# Altium PCB ST-Link.PcbDoc
Units mil, origin at the board's own origin, x right, y up, seen from the top; angles counter-clockwise.
Board outline 1000 x 435 mil, 2 copper layers (Top1, Bottom2), stack 12.8 mil thick; 29 components, 35 nets, 136 pads, 50 vias.
Unrouted connection lines stored in the file: 22.
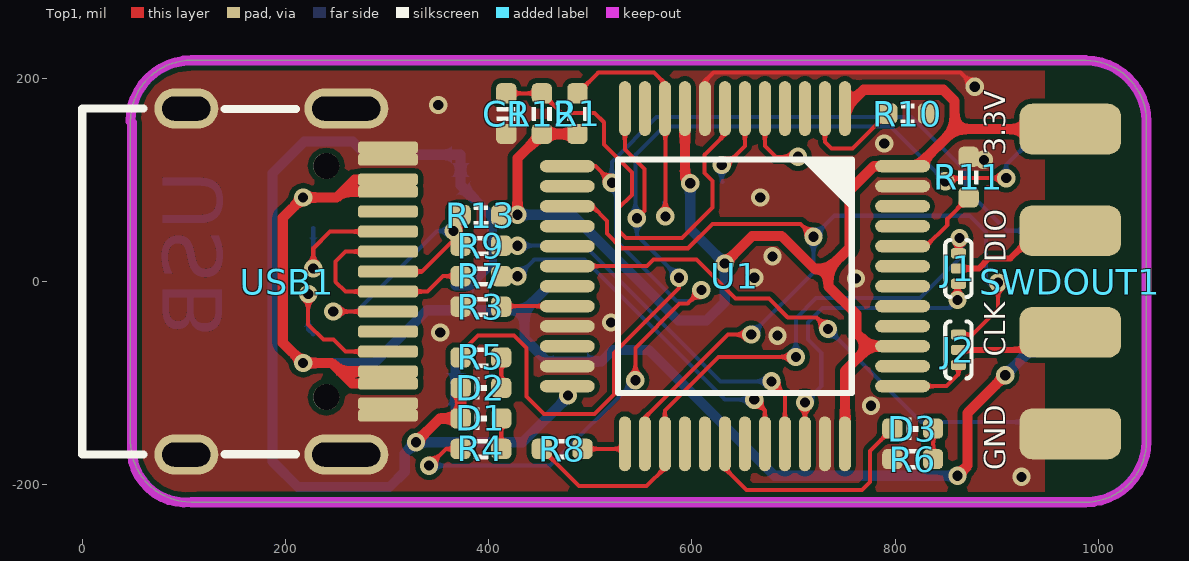
[diagram p0: Top1 view]
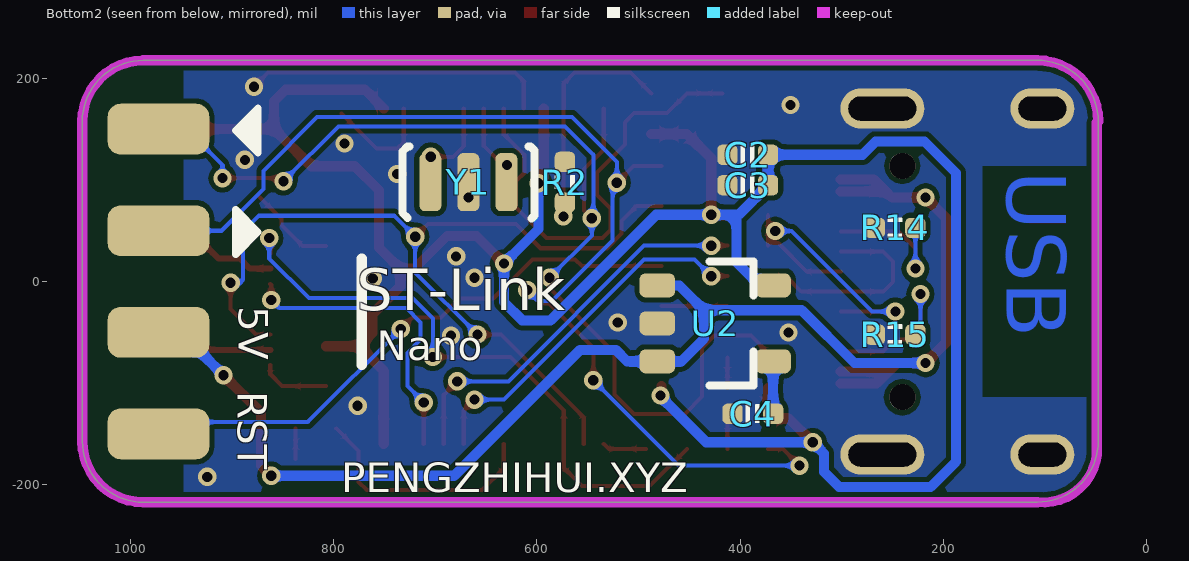
[diagram p1: Bottom2 view, seen from below]
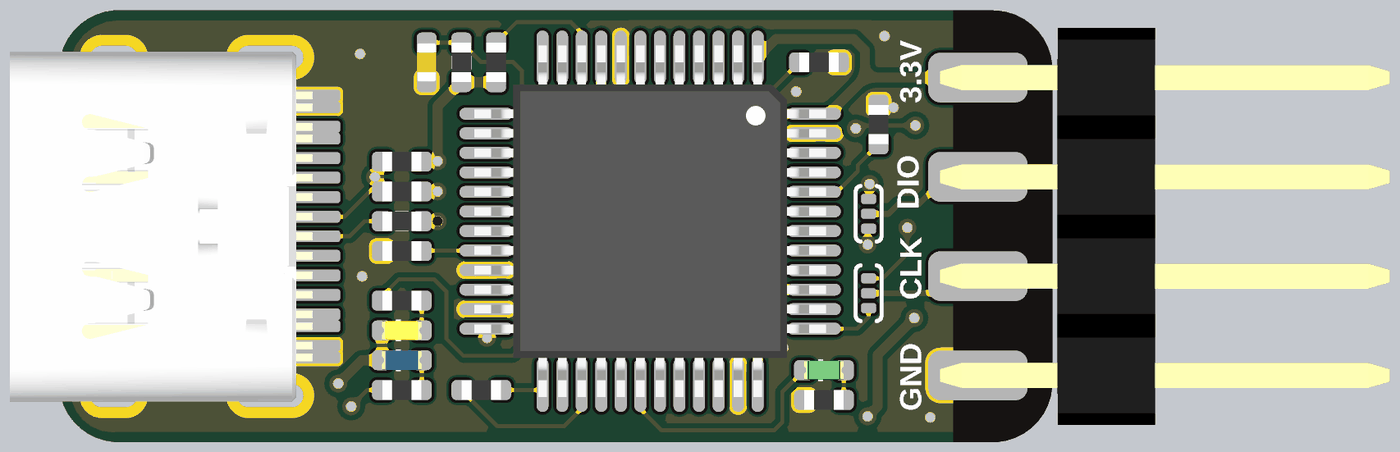
[diagram p2: 3D render of the assembled board from above, using the file's embedded part models]
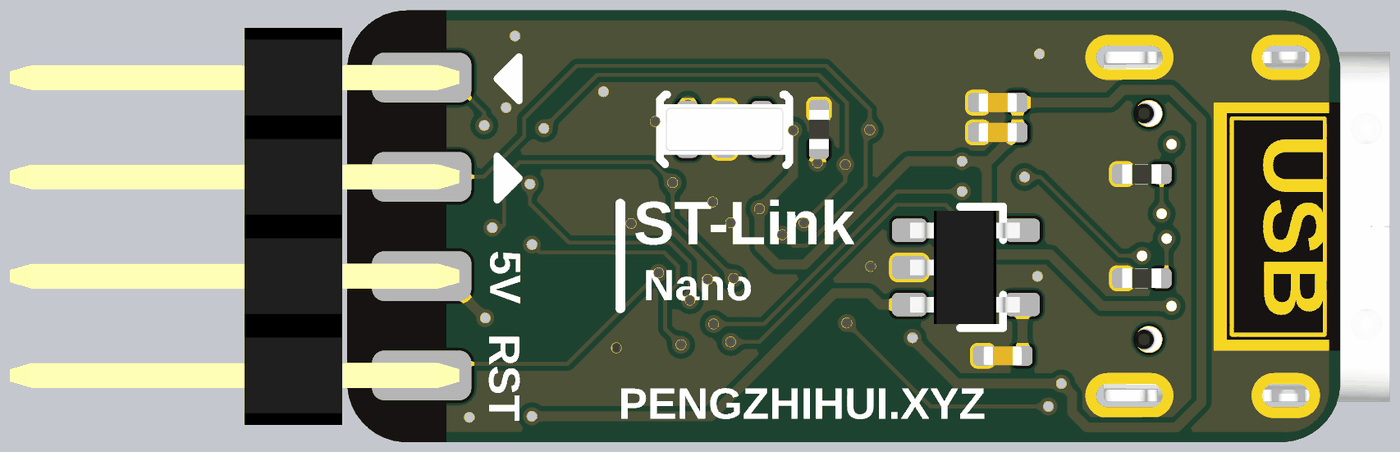
[diagram p3: 3D render of the assembled board from below, using the file's embedded part models]

## Layer stack, top to bottom
Top Solder: solder mask 0.4, Solder Resist, Dk 3.5
Top1: signal copper 1.4
Dielectric 1: core 10, FR-4, Dk 4.2
Bottom2: signal copper 1.4
Bottom Solder: solder mask 0.4, Solder Resist, Dk 3.5

## Board outline
47.36,-157.15 ccw(c107.36,-157.15) 107.36,-217.15 107.36,-217.22 987.31,-217.22 ccw(c987.31,-157.22) 1047.31,-157.22 1047.36,-157.22 1047.36,157.59 ccw(c987.36,157.59) 987.36,217.59 987.36,217.78 107.39,217.78 ccw(c107.39,157.78) 47.39,157.78 47.36,157.78

## Design rules (kind name [scope] priority, off if disabled: settings)
Clearance [All] p1: gap=5 ignorepadtopadclearanceinfootprint=FALSE
ComponentClearance [All] p1: gap=0 collisioncheckmode=3 verticalgap=0 showdistances=FALSE
DiffPairsRouting [All] p1: maxlimit=9 minlimit=9 mostfreqgap=9 toplayer_minwidth=4 toplayer_maxwidth=4 toplayer_prefwidth=4 bottomlayer_minwidth=4 bottomlayer_maxwidth=4 bottomlayer_prefwidth=4 maxuncoupledlength=500
FanoutControl Fanout_BGA [All] p1: bgadir=Out bgaviamode=Centered fanoutstyle=Auto fanoutdirection=Alternating viagrid=1 // Fanout_BGA (Default Rule)
HoleSize [All] p1: absolutevalues=TRUE maxlimit=10000 minlimit=8 maxpercent=80.000 minpercent=20.000
MinimumSolderMaskSliver [All] p1 off: minsoldermaskwidth=2
PlaneClearance [All] p1: clearance=8
PlaneConnect [All] p1: planeconnectstyle=Direct reliefexpansion=20 reliefentries=4 reliefconductorwidth=10 reliefairgap=10
PolygonConnect [All] p1: connectstyle=Direct reliefconductorwidth=10 reliefentries=4 polygonreliefangle="90 Angle" airgapwidth=10
RoutingVias [All] p1: holewidth=8 width=16 viastyle="Through Hole" minholewidth=6 minwidth=12 maxholewidth=28 maxwidth=50
SilkToBoardRegionClearance [All] p1 off:
SilkToSilkClearance [All] p1: silktosilkclearance=0
SilkToSolderMaskClearance [IsPad] p1: minsilkscreentomaskgap=0 clearancetoexposedcopper=TRUE
SolderMaskExpansion [All] p1: expansion=3 istentingtop=FALSE
Width [All] p1: maxlimit=10000 minlimit=4 preferedwidth=4
20 further rules are at their usual default settings.

## Classes and differential pairs
differential pair USB: +USB_P -USB_N

## Components (designator, comment, footprint, x,y, rotation, side; value= is the part's Value field where it differs from the comment)
C1 "0.1uF" CAP_0402 417.36,165.28 r90 top value=0.1u
C2 "0.1uF" CAP_0402 392.36,124.78 r180 bottom value=0.1u
C3 "10uF" CAP_0402 392.36,94.78 r180 bottom value=0.1u
C4 "10nF" CAP_0402 387.36,-130.22 r180 bottom value=0.1u
D1 "color?" LED_0402_BLUE 392.36,-134.72 r0 top
D2 "color?" LED_0402_YELLOW 392.36,-104.72 r0 top
D3 "color?" LED_0402_GREEN 817.36,-144.72 r0 top
J1 "选择跳线" jumper-3 862.36,12.78 r270 top
J2 "选择跳线" jumper-3 862.36,-67.22 r270 top
R1 "10K" RES_0402 487.36,165.28 r90 top value=22R
R2 "10K" RES_0402 572.36,97.78 r90 bottom value=22R
R3 "10K" RES_0402 392.36,-24.72 r180 top value=22R
R4 "680R" RES_0402 392.36,-164.72 r0 top value=22R
R5 "680R" RES_0402 392.36,-74.72 r0 top value=22R
R6 "2K" RES_0402 817.36,-174.72 r0 top value=22R
R7 "22R" RES_0402 392.36,5.28 r0 top
R8 "100R" RES_0402 472.36,-164.72 r180 top value=22R
R9 "22R" RES_0402 392.36,35.28 r0 top
R10 "10K" RES_0402 812.36,165.28 r180 top value=22R
R11 "10K" RES_0402 872.36,102.78 r90 top value=22R
R12 "10K" RES_0402 452.36,165.28 r270 top value=22R
R13 "1K5" RES_0402 392.36,65.28 r0 top value=22R
R14 "5.1K" RES_0402 247.36,52.78 r0 bottom value=22R
R15 "5.1K" RES_0402 247.36,-52.22 r0 bottom value=22R
SWDOUT1 "HDR2x4_2.54" HDR2X4_2.54_180H 972.36,150 r0 top
U1 "STM32F103CBT6" LQFP-48 642.36,5.28 r270 top locked
U2 "SPX3819M5" SOT23-5 422.36,-41.22 r180 bottom
USB1 "Type-C" Type-C-TOP 201.57,0 r180 top
Y1 "8MHz" 晶振-3P 667.36,97.78 r0 bottom

## Footprints (in the part's own frame and the unit in brackets; to place one, negate y for a bottom-side part, rotate by r counter-clockwise, add the part's x,y. Pads: shape width x height; smd on the part's side, far side on the other; paste and mask are expansions set on the pad)
CAP_0402 [mil]
  rrect50% 20x20 smd: 1(-20,0) 2(20,0)
  silkscreen extent -7,-9 7,9, body extent -20,-10 20,10, height 20
HDR2X4_2.54_180H [mil]
  rrect50% 100x50 smd: 1(0,0) 3(0,-100) 5(0,-200) 7(0,-300)
  rrect50% 100x50 smd far side: 2(0,0) 4(0,-100) 6(0,-200) 8(0,-300)
  body extent -38,-350 415,50, height 100
jumper-3 [mil] "选择焊盘"
  rrect50% 10x15 smd: 1(-15,0) 2(0,0) 3(15,0)
  silkscreen extent -28,-13 28,13
LED_0402_BLUE [mil]
  rrect50% 20x20 smd: 1(-20,0) 2(20,0)
  silkscreen extent -6,-10 6,10, body extent -20,-10 20,10, height 18
LED_0402_GREEN [mil]
  rrect50% 20x20 smd: 1(-20,0) 2(20,0)
  silkscreen extent -6,-10 6,10, body extent -20,-10 20,10, height 18
LED_0402_YELLOW [mil]
  rrect50% 20x20 smd: 1(-20,0) 2(20,0)
  silkscreen extent -6,-10 6,10, body extent -20,-10 20,10, height 18
LQFP-48 [mil]
  oval 54x12 smd: 1(-165,108.27) 2(-165,88.58) 3(-165,68.9) 4(-165,49.21) 5(-165,29.53) 6(-165,9.84) 7(-165,-9.84) 8(-165,-29.53) 9(-165,-49.21) 10(-165,-68.9) 11(-165,-88.58) 12(-165,-108.27) 25(165,-108.27) 26(165,-88.58) 27(165,-68.9) 28(165,-49.21) 29(165,-29.53) 30(165,-9.84) 31(165,9.84) 32(165,29.53) 33(165,49.21) 34(165,68.9) 35(165,88.58) 36(165,108.27)
  oval 12x54 smd: 13(-108.27,-165) 14(-88.58,-165) 15(-68.9,-165) 16(-49.21,-165) 17(-29.53,-165) 18(-9.84,-165) 19(9.84,-165) 20(29.53,-165) 21(49.21,-165) 22(68.9,-165) 23(88.58,-165) 24(108.27,-165) 37(108.27,165) 38(88.58,165) 39(68.9,165) 40(49.21,165) 41(29.53,165) 42(9.84,165) 43(-9.84,165) 44(-29.53,165) 45(-49.21,165) 46(-68.9,165) 47(-88.58,165) 48(-108.27,165)
  silkscreen extent -115,-115 115,115, body extent -177,-177 177,177, height 61
RES_0402 [mil]
  rrect50% 20x20 smd: 1(-20,0) 2(20,0)
  silkscreen extent -7,-10 7,10, body extent -20,-10 20,10, height 14
SOT23-5 [mm] "SOT23, 3-Leads, Body 3.1x3.0mm (max), Pitch 0.95mm, IPC Medium Density"
  rrect50% 0.889x0.6 smd: 1(-1.5,0.95) 2(-1.5,0) 3(-1.5,-0.95) 4(1.396,-0.95) 5(1.396,0.95)
  silkscreen extent -0.2,-1.55 0.9,1.55, body extent -1.48,-1.45 1.32,1.45, height 1.2
Type-C-TOP [mm]
  round 0.65 hole 0.65: 0(-0.98,2.89) 0(-0.98,-2.89)
  oval 1.6x1 hole 0.6 slot 1.2 at 0 deg: 1(2.52,4.325) 2(2.52,-4.325)
  oval 2.1x1 hole 0.6 slot 1.7 at 0 deg: 3(-1.48,-4.325) 4(-1.48,4.325)
  rrect50% 1.5x0.3 smd: A1(-2.52,-3.35) A4(-2.52,-2.55) A5(-2.52,-1.25) A6(-2.52,-0.25) A7(-2.52,0.25) A8(-2.52,1.25) A9(-2.52,2.55) A12(-2.52,3.35) B1(-2.52,3.05) B4(-2.52,2.25) B5(-2.52,1.75) B6(-2.52,0.75) B7(-2.52,-0.75) B8(-2.52,-1.75) B9(-2.52,-2.25) B12(-2.52,-3.05)
  silkscreen extent -0.22,-4.33 5.12,4.33, body extent -2.57,-4.48 5.18,4.48, height 3.26
晶振-3P [mm] "贴片晶振"
  rrect50% 0.55x1.45 smd: 1(-0.95,0) 2(0,0) 3(0.95,0)
  silkscreen extent -1.65,-0.89 1.65,0.91, body extent -1.6,-0.89 1.65,0.89, height 0.7

## Part data
C1 C2 C3 C4: library part 电容-0402, "Capacitor"
D1 D2 D3: library part LED_0402, "LED", Type=0402
J1 J2: "Resistor", LatestRevisionDate=17-Jul-2002, LatestRevisionNote="Re-released for DXP Platform.", PackageDescription="Axial Device, Thru-Hole; 2 Leads; 0.4 in Pin Spacing", PackageReference=AXIAL-0.4, Published=8-Jun-2000, Publisher="Altium Limited"
R1 R2 R3 R4 R5 R6 R7 R8 R9 R10 R11 R12 R13 R14 R15: library part 电阻-0402, "Resistor"
SWDOUT1: "Header"
U1: "ARM Cortex-M3 32-bit MCU, 128 KB Flash, 20 KB Internal RAM, 37 I/Os, 48-pin LQFP, -40 to 85 degC, Tray", I/Os (High Current)=37, Operating Frequency(F) (Processor speed) (MHz)=72, Supplier Part Number 1=497-6288-ND, Supply Voltage(Vcc) min (V)=2, A/D Converter="2x12-bit (10 Channel)", ComponentLink1Description="Manufacturer URL", ComponentLink1URL=http://www.st.com/web/en/home.html, ComponentLink2Description=Datasheet, ComponentLink2URL=http://www.st.com/st-web-ui/static/active/en/resource/technical/document/datasheet/CD00161566.pdf, ComponentLink3Description="Package Specification", ComponentLink3URL=http://www.st.com/st-web-ui/static/active/en/resource/technical/document/datasheet/DM00058181.pdf, Core="ARM Cortex-M3", DatasheetVersion="Rev. 16", FLASH Size (Prog) (kB)=128, Internal RAM Size (kB)=20, Mounting Technology="Surface Mount", PackageDescription="48-Pin Low Profile Quad Flat Package, 7 x 7 mm Body, 0.5 mm Pitch", PackageReference=LQFP48, PackageVersion="Rev. 6, 06/2013", Packing=Tray, PartNumber=STM32F103CBT6, Supplier 1=Digi-Key, Supplier 2=Farnell, Supplier 3=Newark, Supplier 4=Newark, Supplier 5=Mouser, Supplier Part Number 2=1606327, Supplier Part Number 3=11N8296, Supplier Part Number 4=57P1214, Supplier Part Number 5=511-STM32F103CBT6
U2: "LDO"
USB1: library part USB-Type-C-TOP
Y1: library part 晶振-3Pin, "村田贴片"

## Via types
v1: diameter 18, hole 10, Top1 to Bottom2, tented both sides, 50 vias

## Nets (pads, with @x,y where several pads share a name; then routed paths per layer and width w, separated by ;. In a path a pad name is that pad's centre, name@x,y a point inside that pad or via, vN(x,y) a via of type N, cw(c..) or ccw(c..) an arc to the next point about the centre after c; other vN are vias at no path point)
3V3: C2.2 C3.2 D1.1 D2.1 R1.1 R12.2 R13.2 SWDOUT1.1 U1.1 U1.9 U1.24 U1.36 U1.39 U1.48 U2.5 | length 2561.3
  Top1 w10: v1(328.36,-158.22) 351.86,-134.72 D1.1 D2.1 ; R13.2 427.86,65.28 v1(428.36,65.78) 428.36,121.28 R12.2 R1.1 ; U1.24 477.36,-111.34 v1(478.15,-112.14) ; U1.9 593.15,101.99 v1(598.36,96.78) ; v1(632.36,17.78) 659.36,44.78 688.36,44.78 720.85,12.29 734.36,12.29 ; U1.36 750.63,-87.96 774.96,-63.62 ; U1.1 769.13,188.78 847.36,188.78 858.59,177.55 858.59,150 ; U1.39 774.96,-63.62 ; SWDOUT1.1@977.36,150 858.59,150 ; 734.36,12.29 734.36,-4.59 762,-32.22 762,-50.66 774.96,-63.62 ; 734.36,12.29 755.36,33.29 755.36,89.78 779.13,113.54 U1.48 822.13,113.54 858.59,150
  Bottom2 w10: U2.5 380.76,-3.82 403.36,18.78 403.36,65.78 ; v1(478.15,-112.14) 478.15,-113.43 433.36,-158.22 v1(328.36,-158.22) 317.36,-169.22 317.36,-187.22 302.36,-202.22 212.36,-202.22 187.36,-177.22 187.36,106.78 218.36,137.78 266.36,137.78 279.36,124.78 C2.2 C3.2 401.36,65.78 403.36,65.78 ; v1(598.36,96.78) 598.36,51.78 v1(632.36,17.78) 632.36,-20.22 614.36,-38.22 586.36,-38.22 482.36,65.78 v1(428.36,65.78) 403.36,65.78
5V: SWDOUT1.6 U2.1 U2.3 USB1.A4 USB1.A9 USB1.B4 USB1.B9 | length 1473.8
  Top1 w10: USB1.A9 265.53,-100.39 253.72,-88.58 ; USB1.B4 253.72,-88.58 ; USB1.B9 256.17,88.58 ; USB1.A4 267.98,100.39 256.17,88.58 ; v1(861.36,-191.22) 871.36,-181.22 871.36,-129.22 v1(908.36,-92.22) ; 253.72,-88.58 245.36,-80.22 v1(217.36,-80.22) 197.36,-60.22 197.36,62.78 v1(217.36,82.78) 250.36,82.78 256.17,88.58
  Bottom2 w10: v1(217.36,-80.22) 287.36,-80.22 339.36,-28.22 435.36,-28.22 ; U2.1 459.76,-3.82 435.36,-28.22 ; v1(861.36,-191.22) 681.36,-191.22 557.36,-67.22 522.36,-67.22 510.96,-78.63 U2.3 457.76,-78.63 435.36,-56.22 435.36,-28.22 ; v1(908.36,-92.22) 950.59,-50 SWDOUT1.6@977.36,-50
GND: C1.1 C2.1 C3.1 C4.1 R2.2 R3.2 R6.1 R10.1 R11.2 R14.2 R15.2 SWDOUT1.7 U1.8 U1.21 U1.23 U1.35 U1.47 U2.2 USB1.1 USB1.2 USB1.3 USB1.4 USB1.A1 USB1.A12 USB1.B1 USB1.B12 Y1.2 | length 301.8
  Top1 w4: U1.8 612.83,197.25 621.36,205.78 864.36,205.78 v1(878.36,191.78)
  other v1: 924.36,-192.22 776.36,-122.22 684.36,-53.22 352.36,-50.22 520.36,-40.22 661.36,3.78 761.5,3.07 679.36,24.78 667.36,82.78 737.36,105.78 887.36,119.78 789.36,135.78 350.36,173.78
JTCK: J2.1 U1.15 U1.26 | length 888.5
  Top1 w4: U1.15 502.07,74.17 516.66,59.59 516.66,47.07 530.96,32.78 596.36,32.78 620.36,56.78 707.04,56.78 v1(719.68,44.13) ; U1.26 553.78,-133.81 635.36,-52.22 v1(658.36,-52.22) ; J2.1 876.36,-52.22 901.36,-27.22 v1(901.36,-1.22)
  Bottom2 w4: v1(658.36,-52.22) 719.68,9.09 v1(719.68,44.13) 740.32,64.78 873.36,64.78 889.36,48.78 889.36,1.78 892.36,-1.22 v1(901.36,-1.22)
JTDI: U1.17
JTDO: U1.16
JTMS: J1.1 R8.2 U1.27 | length 609.6
  Top1 w4: R8.2 488.86,-201.22 555.54,-201.22 573.46,-183.3 U1.27 573.46,-126.85 626.09,-74.22 v1(702.36,-74.22) ; J1.1 862.36,41.78 v1(863.36,42.78)
  Bottom2 w4: v1(702.36,-74.22) 702.36,-36.22 722.36,-16.22 824.36,-16.22 863.36,22.78 v1(863.36,42.78)
LED_RUN: D3.1 U1.30 | length 240.8
  Top1 w4: U1.30 632.52,-183.89 653.86,-205.22 767.36,-205.22 775.36,-197.22 775.36,-166.72 D3.1
NetC1_2: C1.2 R12.1 U1.7 | length 448.7
  Top1 w4: C1.2 R12.1 471.86,165.78 504.36,165.78 513.36,156.78 513.36,134.68 540.86,107.18 540.86,85.28 527.36,71.78 527.36,50.78 535.36,42.78 590.36,42.78 620.36,72.78 620.36,98.78 612.36,106.78 612.36,124.78 632.52,144.93 U1.7
NetC4_2: C4.2 U2.4 | length 51.6
  Bottom2 w10: C4.2 U2.4
NetD1_2: D1.2 R4.2 | length 30
  Top1 w4: R4.2 D1.2
NetD2_2: D2.2 R5.2 | length 30
  Top1 w4: D2.2 R5.2
NetD3_2: D3.2 R6.2 | length 30
  Top1 w4: R6.2 D3.2
NetJ1_2: J1.2 SWDOUT1.3 | length 125.4
  Top1 w6: J1.2 882.36,12.78 892.36,22.78 913.36,22.78 940.59,50 SWDOUT1.3
NetJ2_2: J2.2 SWDOUT1.5 | length 122.1
  Top1 w6: J2.2 960.14,-67.22 SWDOUT1.5@977.36,-50
NetR1_2: R1.2 R2.1 U1.10 | length 244.3
  Top1 w4: R1.2 507.86,205.78 562.73,205.78 573.46,195.04 U1.10 573.87,169.87 v1(573.87,64.16)
  Bottom2 w4: R2.1 573.46,76.67 573.46,64.56 v1(573.87,64.16)
NetR3_1: R3.1 U1.20 | length 64.5
  Top1 w4: R3.1@412.83,-24.25 U1.20
NetR7_2: R7.2 U1.32 | length 360.9
  Top1 w4: R7.2 v1(428.36,5.28) ; v1(661.36,-116.22) 671.89,-126.75 U1.32
  Bottom2 w4: v1(428.36,5.28) 444.86,21.78 494.36,21.78 632.36,-116.22 v1(661.36,-116.22)
NetR8_1: R8.1 U1.25 | length 43.8
  Top1 w4: R8.1 529.09,-164.72 U1.25
NetR9_2: R9.2 U1.33 | length 388.3
  Top1 w4: R9.2 v1(428.36,35.28) ; v1(678.36,-98.22) 691.57,-111.44 U1.33
  Bottom2 w4: v1(428.36,35.28) 494.53,35.28 628.03,-98.22 v1(678.36,-98.22)
NetR10_2: R10.2 U1.2 | length 111.4
  Top1 w4: U1.2 730.94,137.24 737.39,130.8 757.89,130.8 R10.2
NetR11_1: R11.1 U1.44 | length 88.4
  Top1 w4: U1.44 830.43,34.8 851.36,55.74 851.36,61.78 R11.1
NetR14_1: R14.1 USB1.A5 | length 140.2
  Top1 w4: v1(227.36,12.78) 227.36,32.78 243.8,49.21 USB1.A5
  Bottom2 w4: v1(227.36,12.78) R14.1
NetR15_1: R15.1 USB1.B5 | length 161.5
  Top1 w4: v1(222.36,-12.22) 222.36,-42.22 237.36,-57.22 247.36,-57.22 259.04,-68.9 USB1.B5
  Bottom2 w4: v1(222.36,-12.22) 222.36,-47.22 R15.1
NetU1_5: U1.5 Y1.3 | length 73.7
  Top1 w4: U1.5 671.89,133.56 682.68,122.78 v1(704.36,122.78)
NetU1_6: U1.6 Y1.1 | length 84.6
  Top1 w4: v1(629.36,114.78) 633.36,114.78 652.2,133.62 U1.6
  Bottom2 w4: v1(629.36,114.78) 629.36,98.37 Y1.1
nRST: SWDOUT1.8 U1.18 | length 588.9
  Top1 w4: U1.18 555.7,15.12 562.36,21.78 604.36,21.78 642.86,-16.72 675.86,-16.72 694.36,-35.22 ; 709.36,-35.22 694.36,-35.22 ; v1(733.88,-46.64) 722.46,-35.22 694.36,-35.22
  Bottom2 w4: v1(733.88,-46.64) 825.46,-138.22 965.59,-138.22 SWDOUT1.8@977.36,-150
RENUMn: U1.38
RX: R4.1 SWDOUT1.4 U1.13 | length 1165.3
  Top1 w4: v1(341.36,-181.22) 357.86,-164.72 R4.1 ; U1.13 504.97,113.54 v1(521.24,97.27) ; v1(544.36,-97.22) 544.36,-65.2 587.89,-21.68 595.91,-21.68 v1(609.36,-8.22)
  Bottom2 w4: v1(341.36,-181.22) 460.36,-181.22 v1(544.36,-97.22) ; v1(609.36,-8.22) 598.36,-19.22 585.09,-19.22 525.36,40.5 525.36,93.15 v1(521.24,97.27) 521.24,117.65 565.36,161.78 816.36,161.78 869.18,108.96 869.18,90.96 910.14,50 928.14,50 SWDOUT1.4
ST_SWCLK: J2.3 U1.37 | length 68.9
  Top1 w4: U1.37 850.59,-102.99 862.36,-91.22 J2.3
ST_SWDIO: J1.3 U1.34 | length 304.1
  Top1 w4: U1.34 v1(711.26,-119.12) ; v1(861.36,-18.22) 861.36,-3.22 J1.3
  Bottom2 w4: v1(711.26,-119.12) 727.36,-103.02 727.36,-70.22 714.36,-57.22 714.36,-40.22 728.36,-26.22 853.36,-26.22 v1(861.36,-18.22)
T_SWO: U1.31
TX: R5.1 SWDOUT1.2 U1.12 | length 1120.5
  Top1 w4: R5.1 372.36,-70.22 389.36,-53.22 425.04,-53.22 437.36,-65.55 437.36,-113.22 454.36,-130.22 504.36,-130.22 523.36,-111.22 523.36,-70.22 587.36,-6.22 v1(587.36,3.78) ; U1.12 534.09,130.04 553.47,110.67 553.47,69.88 v1(545.86,62.28) ; v1(849.36,98.78) 852.36,101.78 v1(909.36,101.78)
  Bottom2 w4: v1(587.36,3.78) 545.86,45.28 v1(545.86,62.28) 544.36,63.78 544.36,124.78 572.36,152.78 795.36,152.78 v1(849.36,98.78) ; v1(909.36,101.78) 909.36,114.78 944.59,150 SWDOUT1.2
USB_N: R7.1 USB1.A7 USB1.B7 | length 208.7
  Top1 w4: USB1.B7 259.11,29.53 249.36,19.78 249.36,-0.22 258.98,-9.84 USB1.A7 339.74,-9.84 354.86,5.28 R7.1
USB_P: R9.1 R13.1 USB1.A6 USB1.B6 | length 332.9
  Top1 w4: v1(247.06,-29.53) USB1.B6 ; USB1.A6 334.43,9.84 362.36,37.78 R9.1@369.86,37.78 ; v1(365.36,49.78) 365.36,42.28 R9.1@369.86,37.78 ; R13.1 372.36,49.78 R9.1 R9.1@369.86,37.78
  Bottom2 w4: v1(247.06,-29.53) 270.06,-29.53 349.36,49.78 v1(365.36,49.78)
pads on no net: U1.3 U1.4 U1.11 U1.14 U1.19 U1.22 U1.28 U1.29 U1.40 U1.41 U1.42 U1.43 U1.45 U1.46 USB1.0 USB1.A8 USB1.B8

## Polygon pours and split planes (outlines as drawn)
GND on Bottom2 "GND_L02_P000" (solid, remove dead copper, pour order 0): 47.36,217.78 947.36,217.78 947.36,-217.22 47.36,-217.22
GND on Top1 "GND_L01_P001" (solid, remove dead copper, pour order 1): 47.36,217.78 947.36,217.78 947.36,-217.22 47.36,-217.22

## Keep-outs
Keep-Out Layer:
  lines w10: 47.36,157.78 cw(c107.37,157.76) 107.39,217.78 987.36,217.78 ; 48.82,156.32 48.82,-170.28 ccw(c101.53,-164.44) 107.36,-217.15 ; 107.36,-217.22 987.31,-217.22 ccw(c987.33,-157.2) 1047.36,-157.22 1047.36,157.59 ccw(c987.36,157.59) 987.36,217.59

## Other copper
Bottom2:
  text "USB" at 156.8,109.01 h100 r90

## Silkscreen, mask and mechanical layers (free items; w line width, h text height)
Top Overlay:
  text "3.3V" at 915.36,124.18 h35 r90
  text "DIO" at 915.78,19.18 h35 r90
  text "CLK" at 915.36,-73.82 h35 r90
  text "GND" at 915.36,-185.82 h35 r90
Bottom Overlay:
  region: 874.36,170.78 874.36,126.78 896.36,148.78
  region: 896.36,26.78 896.36,70.78 874.36,48.78
  lines w7: 874.36,48.78 896.36,26.78 896.36,70.78 874.36,48.78 ; 874.36,126.78 896.36,148.78 874.36,170.78 874.36,126.78
  lines w10: 772.36,-82.22 772.36,22.78
  text "5V" at 903.36,-24.22 h50 r90
  text "ST-Link" at 777.36,-42.22 h70
  text "Nano" at 757.36,-87.22 h50
  text "RST" at 904.36,-108.22 h50 r90
  text "PENGZHIHUI.XYZ" at 792.36,-217.22 h50
Top Solder:
  rectangle: 947.36,-217.22 1052.36,217.78
Bottom Solder:
  rectangle: 47.36,-125 175,125
  rectangle: 947.36,-217.22 1052.36,217.78
Mechanical 1:
  lines w10: 47.36,157.78 47.36,-157.15 ccw(c107.36,-157.15) 107.36,-217.15 ; 47.39,157.78 cw(c107.39,157.78) 107.39,217.78 987.36,217.78 ; 107.36,-217.22 987.31,-217.22 ccw(c987.31,-157.22) 1047.31,-157.22 ; 987.36,217.59 cw(c987.36,157.59) 1047.36,157.59 1047.36,-157.22